# Altium PCB clock_pcb.PcbDoc (part 2 of 2)
Units mm, origin at the board's own origin, x right, y up, seen from the top; angles counter-clockwise.
Board outline 163.83 x 193.04 mm, 2 copper layers (Top Layer, Bottom Layer); 227 components, 201 nets, 760 pads, 289 vias.
Unrouted connection lines stored in the file: 74.
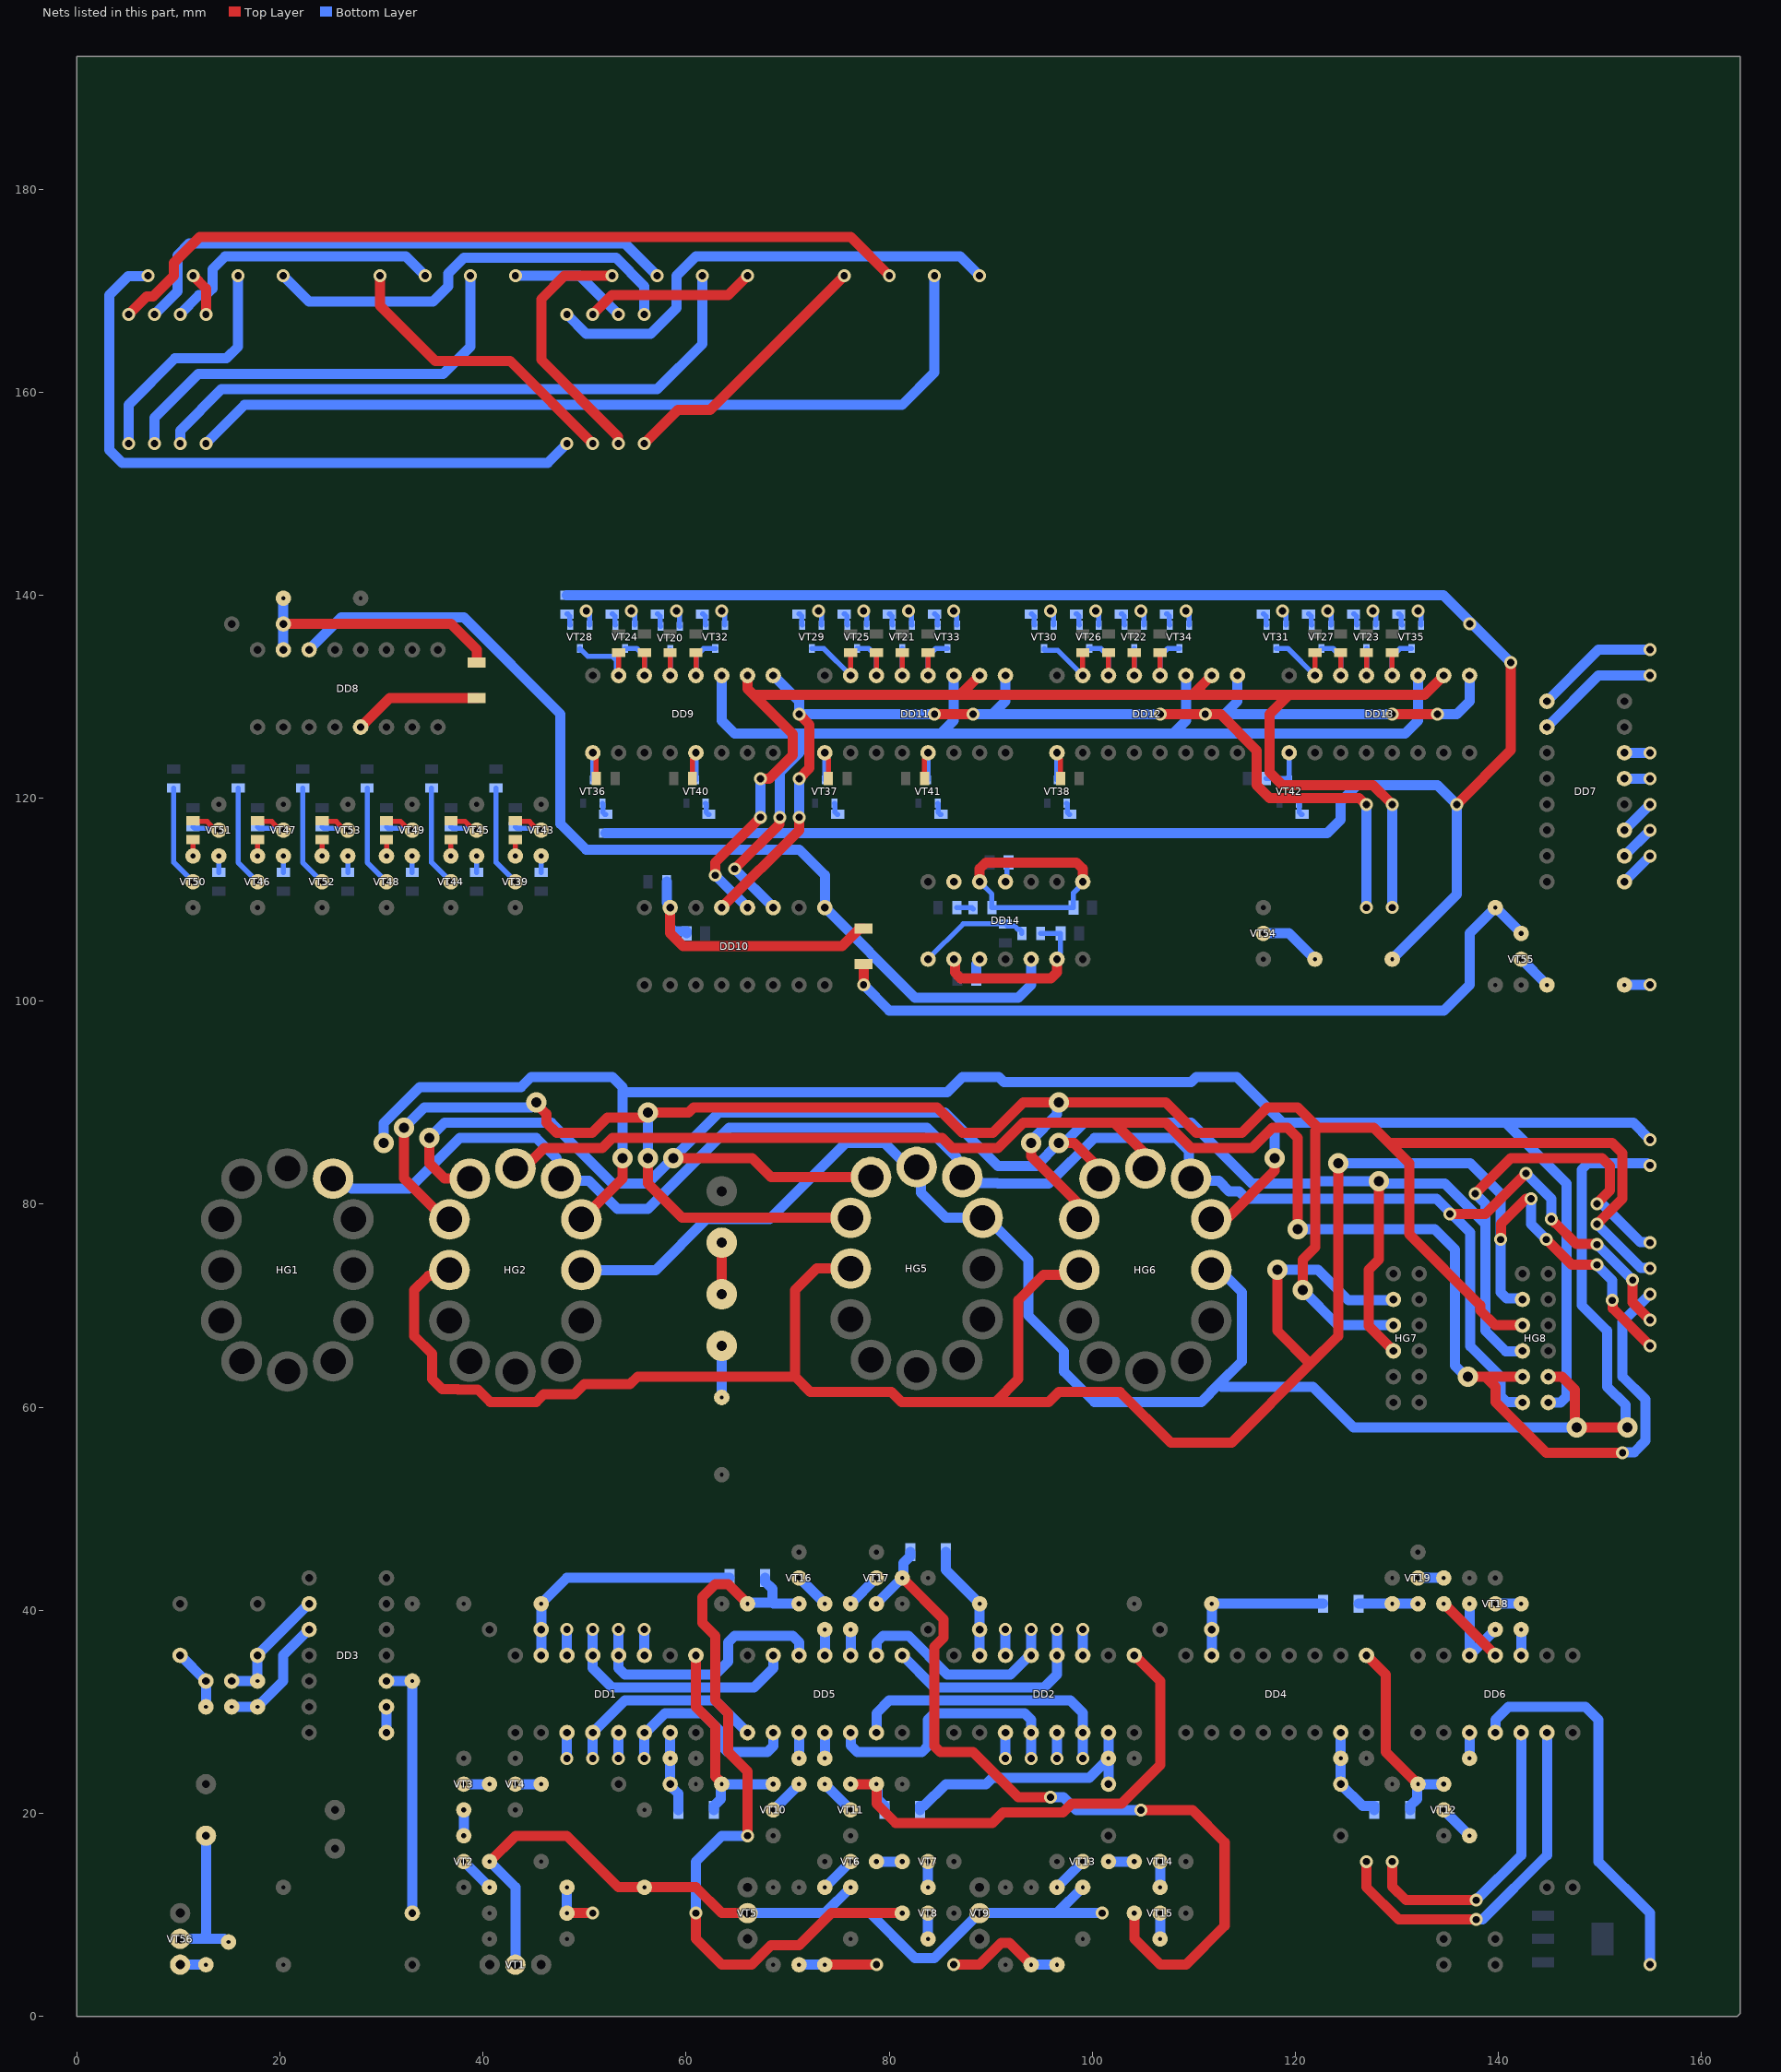
[diagram p2: the nets of this part, all layers, seen from the top]

## Via types
v1: diameter 1.27, hole 0.711, Top Layer to Bottom Layer, 220 vias
v2: diameter 2, hole 1, Top Layer to Bottom Layer, 49 vias
v3: diameter 3, hole 2, Top Layer to Bottom Layer, 16 vias
v4: diameter 2, hole 0.7, Top Layer to Bottom Layer, 2 vias
v5: diameter 2, hole 0.711, Top Layer to Bottom Layer, 2 vias

## Nets (pads, with @x,y where several pads share a name; then routed paths per layer and width w, separated by ;. In a path a pad name is that pad's centre, name@x,y a point inside that pad or via, vN(x,y) a via of type N, cw(c..) or ccw(c..) an arc to the next point about the centre after c; other vN are vias at no path point) (continued)
K3: DD7.9 HG2.9 HG5.9 HG6.9 HG7.5 HG8.5 | length 245.2
  Top Layer w1: HG2.9@36.68,73.5 36.106,72.926 34.626,72.926 33.22,71.52 33.22,67.02 34.97,65.27 34.97,62.77 35.97,61.77 37.515,61.77 37.539,61.746 39.494,61.746 40.72,60.52 45.22,60.52 45.97,61.27 48.97,61.27 49.97,62.27 54.47,62.27 55.22,63.02 70.72,63.02 ; HG5.9@76.2,73.66 72.86,73.66 70.72,71.52 70.72,63.02 ; HG6.9@98.72,73.52 98.22,73.02 95.22,73.02 92.72,70.52 92.72,62.77 90.47,60.52 ; v2@118.345,73.395 v2(118.22,73.52) 118.22,67.52 121.47,64.27 ; v2(124.22,84.02) 124.22,67.02 121.47,64.27 ; v1(140.22,76.52) 140.272,76.572 140.272,78.072 v1@142.72,80.52 ; v1(144.72,76.52) 147.22,74.02 v1(149.72,74.02) ; v1(151.22,70.52) 151.272,70.468 151.272,69.708 v1(154.94,66.04) ; 70.72,63.02 72.22,61.52 80.22,61.52 81.22,60.52 90.47,60.52 ; 90.47,60.52 95.72,60.52 96.72,61.52 102.72,61.52 107.72,56.52 113.72,56.52 121.47,64.27
  Bottom Layer w1: v2(118.22,73.52) 122.22,73.52 125.22,70.52 129.56,70.52 HG7.5@129.66,70.62 ; v2(124.22,84.02) 124.227,84.012 127.477,84.012 127.493,84.028 137.212,84.028 140.22,81.02 v1(140.22,76.52) 140.22,71.306 140.806,70.72 142.26,70.72 HG8.5@142.36,70.62 ; v1(143.22,80.52) 143.22,78.02 v1(144.72,76.52) ; v1(149.72,74.02) 149.72,74.001 151.22,72.501 v1(151.22,70.52) ; DD7.9@152.4,111.76 v1(154.94,114.3)
K4: DD7.13 HG2.8 HG5.8 HG6.8 HG7.6 HG8.6 | length 254.9
  Top Layer w1: v2@32.029,87.711 v2(32.22,87.52) 32.22,82.52 36.24,78.5 HG2.8@36.68,78.5 ; v2(45.22,90.02) 45.22,89.885 46.22,88.885 46.22,88.02 47.22,87.02 50.72,87.02 52.22,88.52 55.72,88.52 v2(56.22,89.02) 60.22,89.02 60.72,89.52 84.72,89.52 87.22,87.02 90.22,87.02 93.22,90.02 v2(96.72,90.02) 107.22,90.02 110.22,87.02 114.72,87.02 117.22,89.52 120.22,89.52 122.22,87.52 ; v2(56.22,84.52) 56.22,82.02 59.58,78.66 HG5.8@76.2,78.66 ; v2(93.97,86.02) 93.97,84.71 HG6.8@100.18,78.5 ; v2(120.72,71.52) 120.72,74.52 121.974,75.774 121.974,87.274 122.22,87.52 ; HG8.6@142.36,68.08 139.66,68.08 138.22,69.52 138.22,70.02 131.22,77.02 131.22,84.02 129.22,86.02 ; v1(149.718,78.022) 149.722,78.022 152.22,80.52 152.22,85.02 151.22,86.02 129.22,86.02 ; 122.22,87.52 127.72,87.52 129.22,86.02
  Bottom Layer w1: v2(32.22,87.52) 34.22,89.52 44.72,89.52 v2(45.22,90.02) ; v2(56.22,84.52) v2(56.22,89.02) ; v2(93.97,86.02) 93.97,86.27 96.529,88.829 96.529,89.829 v2(96.72,90.02) ; v2(120.72,71.52) 124.16,68.08 HG7.6@129.66,68.08 ; v1(149.718,78.022) 154.028,73.712 154.888,73.712 v1(154.94,73.66) ; DD7.13@152.4,121.92 v1(154.94,121.92)
K5: DD7.14 HG2.7 HG5.7 HG6.7 HG7.7 HG8.7 | length 216.8
  Top Layer w1: v2(34.72,86.52) 34.72,84.02 36.22,82.52 38.66,82.52 HG2.7@38.68,82.5 ; v2(58.72,84.52) 66.509,84.52 68.369,82.66 HG5.7@78.2,82.66 ; v2(96.72,86.02) 98.22,86.02 101.74,82.5 HG6.7@102.18,82.5 ; v2(128.22,82.274) 128.22,74.52 127.22,73.52 127.22,67.98 HG7.7@129.66,65.54 ; v1(137.72,81.02) 141.22,84.52 150.201,84.52 150.966,83.755 150.966,81.339 149.72,80.093 v1(149.72,80.02) ; HG8.7@142.34,65.52 HG8.7@142.36,65.54
  Bottom Layer w1: v2(34.72,86.52) 36.22,88.02 46.72,88.02 52.72,82.02 56.201,82.02 58.701,84.52 v2(58.72,84.52) 63.22,89.02 85.47,89.02 90.72,83.77 94.47,83.77 v2(96.72,86.02) ; v2@97.431,86.231 99.22,88.02 109.72,88.02 115.72,82.02 121.708,82.02 121.953,82.266 128.212,82.266 v2(128.22,82.274) ; v2@128.22,82.02 134.72,82.02 138.72,78.02 ; v1(137.72,81.02) 138.72,80.02 138.72,78.02 ; HG8.7@142.36,65.54 142.34,65.52 140.72,65.52 138.72,67.52 138.72,78.02 ; v1(149.72,80.02) 150.22,80.02 153.988,76.252 154.888,76.252 v1(154.94,76.2) ; DD7.14@152.4,124.46 v1(154.94,124.46)
K6: DD7.11 HG2.6 HG6.6 HG8.8 | length 172.6
  Top Layer w1: HG2.6@43.18,83.5 43.992,83.5 46.012,85.52 51.72,85.52 52.72,86.52 85.22,86.52 86.22,85.52 90.72,85.52 93.22,88.02 102.16,88.02 ; HG6.6@106.68,83.5 102.16,88.02 ; v2(120.22,77.52) 120.224,77.524 120.224,86.516 119.22,87.52 117.72,87.52 115.72,85.52 109.72,85.52 107.22,88.02 102.16,88.02 ; v2(137.011,63) 138.72,63 ; HG8.8@142.36,63 138.72,63 ; v1(152.22,55.52) 144.72,55.52 139.72,60.52 139.72,62 138.72,63
  Bottom Layer w1: v2(120.22,77.52) 133.72,77.52 135.72,75.52 135.72,64.086 136.806,63 v2(137.011,63) ; v1(152.22,55.52) 152.272,55.572 153.374,55.572 154.474,56.671 154.474,60.766 152.22,63.02 152.22,68.4 v1(154.94,71.12) ; DD7.11@152.4,116.84 v1(154.94,119.38)
K7: DD7.10 HG1.5 HG2.5 HG5.5 HG6.5 HG8.9 | length 185.4
  Top Layer w1: v1(135.22,79.02) 138.72,79.02 v1(142.72,83.02) ; v1@145.595,78.145 147.668,76.072 149.668,76.072 v1(149.72,76.02) ; v1(153.22,72.52) 153.22,70.3 v1(154.94,68.58)
  Bottom Layer w1: HG1.5@24.274,82.086 26.466,82.086 27.032,81.52 32.72,81.52 37.72,86.52 45.22,86.52 47.22,84.52 47.22,82.96 HG2.5@47.68,82.5 47.875,82.305 50.435,82.305 53.22,79.52 56.22,79.52 64.22,87.52 83.72,87.52 86.626,84.614 86.626,83.234 HG5.5@87.2,82.66 87.774,82.086 90.62,82.086 90.686,82.02 95.72,82.02 100.22,86.52 108.22,86.52 109.495,85.245 109.495,82.745 HG6.5@109.72,82.52 109.945,82.295 112.445,82.295 113.466,81.274 114.466,81.274 115.22,80.52 133.908,80.52 135.085,79.343 135.085,79.228 135.205,79.108 v1@135.308,79.108 ; v1@135.314,79.114 137.22,77.208 137.22,66.02 140.22,63.02 140.22,61.106 140.806,60.52 142.3,60.52 HG8.9@142.36,60.46 ; v1(142.72,83.02) 145.22,80.52 v1(145.22,78.52) ; v1(149.72,76.02) v1(153.22,72.52) ; DD7.10@152.4,114.3 v1(154.94,116.84)
K8: DD7.1 HG2.4 HG6.4 HG8.10 | length 202.9
  Top Layer w1: HG2.4@49.68,78.5 53.72,82.54 v2(53.72,84.52) ; HG6.4@113.18,78.5 117.97,83.29 v2(117.97,84.52)
  Bottom Layer w1: v2(30.22,86.02) 30.22,88.001 33.739,91.52 43.72,91.52 44.72,92.52 52.72,92.52 53.72,91.52 53.72,91.02 ; v2(53.72,84.52) 53.72,91.02 ; v2(117.97,84.52) 117.97,87.27 118.72,88.02 ; DD7.1@144.78,129.54 149.86,134.62 v1(154.94,134.62) ; HG8.10@144.9,60.46 146.134,60.46 146.72,61.046 146.72,82.02 140.72,88.02 ; v1(154.94,86.36) 153.28,88.02 140.72,88.02 ; 53.72,91.02 85.72,91.02 87.22,92.52 90.806,92.52 91.306,92.02 109.72,92.02 110.22,92.52 114.22,92.52 118.72,88.02 ; 118.72,88.02 140.72,88.02
K9: DD7.2 HG2.3 HG5.4 HG5.6 HG6.3 HG8.11 | length 193.5
  Top Layer w1: HG8.11@144.9,63 146.24,63 147.529,61.711 147.529,58.211 v2(147.72,58.02) v2@152.22,58.02
  Bottom Layer w1: HG2.3@49.68,73.5 56.99,73.5 62.01,78.52 68.22,78.52 75.72,86.02 79.528,86.02 81.888,83.66 HG5.6@82.7,83.66 83.115,83.245 83.115,81.125 85.58,78.66 89.58,78.66 93.72,74.52 93.72,69.02 97.22,65.52 97.22,63.52 100.22,60.52 110.72,60.52 112.47,62.27 114.72,64.52 114.72,71.332 112.532,73.52 HG6.3@111.72,73.52 ; 112.72,62.02 121.72,62.02 125.72,58.02 v2(147.72,58.02) ; DD7.2@144.78,127 149.86,132.08 v1(154.94,132.08) ; v2(152.72,58.02) 152.529,58.211 152.529,60.211 150.72,62.02 150.72,67.52 148.188,70.052 148.188,83.383 148.816,84.01 154.677,84.01 154.867,83.82 v1(154.94,83.82)
M1_Q1: DD2.3 VT28.2 | length 70.3
  Bottom Layer w0.5: v1(50.165,138.43) 50.48,138.115 VT28.2@50.48,137.04
  Bottom Layer w1: v1(6.985,171.45) 6.933,171.398 5.028,171.398 3.175,169.545 3.175,154.305 4.445,153.035 46.355,153.035 v1(48.26,154.94) ; v1(91.44,25.4) DD2.3@91.44,27.94
M1_Q2: DD2.4 DD5.5 VT29.2 | length 57.5
  Top Layer w1: v1(29.845,171.45) 29.845,168.529 35.306,163.068 42.672,163.068 v1(50.8,154.94)
  Bottom Layer w0.5: v1(73.025,138.43) 73.34,138.115 VT29.2@73.34,137.04
  Bottom Layer w1: DD5.5@76.2,27.94 76.2,26.67 76.835,26.035 83.234,26.035 83.82,26.621 83.82,29.21 84.455,29.845 93.345,29.845 93.98,29.21 DD2.4@93.98,27.94 v1(93.98,25.4)
M1_Q3: DD2.5 VT30.2 | length 29.4
  Top Layer w1: v1(52.705,171.45) 48.006,171.45 45.72,169.164 45.72,163.195 53.288,155.627 53.288,154.992 v1(53.34,154.94)
  Bottom Layer w0.5: v1(95.885,138.43) 96.2,138.115 VT30.2@96.2,137.04
  Bottom Layer w1: v1(96.52,25.4) DD2.5@96.52,27.94
M1_Q4: DD2.6 DD5.6 VT31.2 | length 55.8
  Top Layer w1: v1(55.88,154.94) 59.182,158.242 62.357,158.242 v1(75.565,171.45)
  Bottom Layer w0.5: v1(118.745,138.43) 119.06,138.115 VT31.2@119.06,137.04
  Bottom Layer w1: DD5.6@78.74,27.94 78.74,29.845 79.994,31.099 97.855,31.099 99.06,29.894 DD2.6@99.06,27.94 v1(99.06,25.4)
M10_Q1: DD2.11 VT32.2 | length 47.2
  Bottom Layer w0.5: v1(63.5,138.43) 63.815,138.115 VT32.2@63.815,137.04
  Bottom Layer w1: v1(20.32,171.45) 22.86,168.91 35.052,168.91 36.576,170.434 36.576,171.704 38.1,173.228 53.086,173.228 55.88,170.434 v1(55.88,167.64) ; DD2.11@99.06,35.56 v1(99.06,38.1)
M10_Q2: DD2.12 DD5.8 VT33.2 | length 34.8
  Bottom Layer w0.5: v1(86.36,138.43) 86.36,138.222 86.625,137.957 86.625,137.09 VT33.2@86.675,137.04
  Bottom Layer w1: v1(43.18,171.45) 49.53,171.45 v1(53.34,167.64) ; DD5.8@81.28,35.56 84.455,32.385 95.25,32.385 96.52,33.655 DD2.12@96.52,35.56 v1(96.52,38.1)
M10_Q3: DD2.13 DD5.9 VT34.2 | length 40
  Top Layer w1: v1(50.8,167.64) 52.705,169.545 64.135,169.545 v1(66.04,171.45)
  Bottom Layer w0.5: v1(109.22,138.43) 109.535,138.115 VT34.2@109.535,137.04
  Bottom Layer w1: DD5.9@78.74,35.56 78.74,36.83 79.375,37.465 81.915,37.465 85.725,33.655 91.933,33.655 93.838,35.56 DD2.13@93.98,35.56 v1(93.98,38.1)
M10_Q4: DD2.14 VT35.2 | length 51.3
  Bottom Layer w0.5: v1(132.08,138.43) 132.395,138.115 VT35.2@132.395,137.04
  Bottom Layer w1: v1(48.26,167.64) 50.165,165.735 56.515,165.735 59.055,168.275 59.055,171.45 60.96,173.355 86.995,173.355 v1(88.9,171.45) ; DD2.14@91.44,35.56 v1(91.44,38.1)
MUX1_D1: DD9.13 R44.2 VT20.3 | length 4.8
  Top Layer w0.5: DD9.13@58.42,132.08 R44.2@58.42,134.33
  Bottom Layer w0.5: DD9.13@58.42,132.08 VT20.3@58.42,134.62
MUX1_D2: DD9.14 R52.2 VT24.3 | length 6.4
  Top Layer w0.5: DD9.14@55.88,132.08 R52.2@55.88,134.33
  Bottom Layer w0.5: VT24.3@53.975,134.74 55.125,134.74 55.88,133.985 DD9.14@55.88,132.08
MUX1_D3: DD9.15 R60.2 VT28.3 | length 8
  Top Layer w0.5: DD9.15@53.34,132.08 R60.2@53.34,134.33
  Bottom Layer w0.5: VT28.3@49.53,134.74 49.53,134.59 49.58,134.54 49.73,134.54 50.285,133.985 52.705,133.985 53.144,133.546 53.144,132.276 DD9.15@53.34,132.08
MUX1_D4: DD9.12 R68.2 VT32.3 | length 6.4
  Top Layer w0.5: DD9.12@60.96,132.08 R68.2@60.96,134.33
  Bottom Layer w0.5: DD9.12@60.96,132.08 60.96,133.985 61.715,134.74 VT32.3@62.865,134.74
MUX1_D5: DD9.1 R75.2 VT36.3 | length 5.3
  Top Layer w0.5: DD9.1@50.8,124.46 50.8,124.183 51.145,123.838 R75.2@51.145,121.92
  Bottom Layer w0.5: VT36.3@50.8,121.8 DD9.1@50.8,124.46
MUX1_D6: DD9.5 R84.2 VT40.3 | length 5.3
  Top Layer w0.5: R84.2@60.615,121.92 60.615,123.838 60.96,124.183 DD9.5@60.96,124.46
  Bottom Layer w0.5: VT40.3@60.96,121.8 DD9.5@60.96,124.46
MUX2_D1: DD11.13 R45.2 VT21.3 | length 4.9
  Top Layer w0.5: DD11.13@81.28,132.08 R45.2@81.28,134.33
  Bottom Layer w0.5: DD11.13@81.28,132.08 VT21.3@81.28,134.74
MUX2_D2: DD11.14 R53.2 VT25.3 | length 6.4
  Top Layer w0.5: DD11.14@78.74,132.08 R53.2@78.74,134.33
  Bottom Layer w0.5: VT25.3@76.835,134.74 77.985,134.74 78.74,133.985 DD11.14@78.74,132.08
MUX2_D3: DD11.15 R61.2 VT29.3 | length 7.2
  Top Layer w0.5: DD11.15@76.2,132.08 R61.2@76.2,134.33
  Bottom Layer w0.5: VT29.3@72.39,134.74 73.54,134.74 DD11.15@76.2,132.08
MUX2_D4: DD11.12 R69.2 VT33.3 | length 6.4
  Top Layer w0.5: DD11.12@83.82,132.08 R69.2@83.82,134.33
  Bottom Layer w0.5: DD11.12@83.82,132.08 83.82,133.985 84.575,134.74 VT33.3@85.725,134.74
MUX2_D5: DD11.1 R76.2 VT37.3 | length 5.3
  Top Layer w0.5: DD11.1@73.66,124.46 73.66,124.183 74.005,123.838 R76.2@74.005,121.92
  Bottom Layer w0.5: VT37.3@73.66,121.8 DD11.1@73.66,124.46
MUX2_D6: DD11.5 R85.2 VT41.3 | length 5.3
  Top Layer w0.5: R85.2@83.475,121.92 83.475,123.838 83.82,124.183 DD11.5@83.82,124.46
  Bottom Layer w0.5: VT41.3@83.82,121.8 DD11.5@83.82,124.46
MUX3_D1: DD12.13 R46.2 VT22.3 | length 4.9
  Top Layer w0.5: DD12.13@104.14,132.08 R46.2@104.14,134.33
  Bottom Layer w0.5: DD12.13@104.14,132.08 VT22.3@104.14,134.74
MUX3_D2: DD12.14 R54.2 VT26.3 | length 6.4
  Top Layer w0.5: DD12.14@101.6,132.08 R54.2@101.6,134.33
  Bottom Layer w0.5: VT26.3@99.695,134.74 100.845,134.74 101.6,133.985 DD12.14@101.6,132.08
MUX3_D3: DD12.15 R62.2 VT30.3 | length 7.2
  Top Layer w0.5: DD12.15@99.06,132.08 R62.2@99.06,134.33
  Bottom Layer w0.5: VT30.3@95.25,134.74 95.25,134.613 95.3,134.563 96.577,134.563 DD12.15@99.06,132.08
MUX3_D4: DD12.12 R70.2 VT34.3 | length 6.4
  Top Layer w0.5: DD12.12@106.68,132.08 R70.2@106.68,134.33
  Bottom Layer w0.5: DD12.12@106.68,132.08 106.68,133.985 107.435,134.74 VT34.3@108.585,134.74
MUX3_D5: DD12.1 R77.2 VT38.3 | length 5.3
  Top Layer w0.5: DD12.1@96.52,124.46 96.52,124.183 96.865,123.838 R77.2@96.865,121.92
  Bottom Layer w0.5: VT38.3@96.52,121.8 DD12.1@96.52,124.46
MUX4_D1: DD13.13 R47.2 VT23.3 | length 4.9
  Top Layer w0.5: DD13.13@127,132.08 R47.2@127,134.33
  Bottom Layer w0.5: DD13.13@127,132.08 VT23.3@127,134.74
MUX4_D2: DD13.14 R55.2 VT27.3 | length 6.4
  Top Layer w0.5: DD13.14@124.46,132.08 R55.2@124.46,134.33
  Bottom Layer w0.5: VT27.3@122.555,134.74 123.705,134.74 124.46,133.985 DD13.14@124.46,132.08
MUX4_D3: DD13.15 R63.2 VT31.3 | length 7.2
  Top Layer w0.5: DD13.15@121.92,132.08 R63.2@121.92,134.33
  Bottom Layer w0.5: VT31.3@118.11,134.74 119.26,134.74 DD13.15@121.92,132.08
MUX4_D4: DD13.12 R71.2 VT35.3 | length 6.4
  Top Layer w0.5: DD13.12@129.54,132.08 R71.2@129.54,134.33
  Bottom Layer w0.5: DD13.12@129.54,132.08 129.54,133.985 130.295,134.74 VT35.3@131.445,134.74
MUX4_D5: DD13.1 R86.2 VT42.3 | length 5
  Bottom Layer w0.5: R86.2@117.13,121.92 119.26,121.92 VT42.3@119.38,121.8 DD13.1@119.38,124.46
MUX_CLK: DD8.14 DD10.1 DD14.5 | length 99.2
  Bottom Layer w1: DD8.14@22.86,134.62 26.035,137.795 38.1,137.795 47.625,128.27 47.625,117.475 50.165,114.935 71.12,114.935 73.66,112.395 DD10.1@73.66,109.22 82.55,100.33 92.71,100.33 93.98,101.6 DD14.5@93.98,104.14
MUX_IN_EN: R40.1 R41.1 R42.1 R43.1 R48.1 R49.1 R50.1 R51.1 R56.1 R57.1 R58.1 R59.1 R64.1 R65.1 R66.1 R67.1 R72.1 R73.1 R74.1 R79.1 R80.1 R81.1 R109.1 | length 217.4
  Top Layer w1: v1(135.89,119.38) 141.224,124.714 v1(141.224,133.35)
  Bottom Layer w1: R56.1@48.26,139.99 R48.1@52.705,139.99 R40.1@57.15,139.99 R64.1@61.595,139.99 R57.1@71.12,139.99 R49.1@75.565,139.99 R41.1@80.01,139.99 R65.1@84.455,139.99 R58.1@93.98,139.99 R50.1@98.425,139.99 R42.1@102.87,139.99 R66.1@107.315,139.99 R59.1@116.84,139.99 R51.1@121.285,139.99 R43.1@125.73,139.99 R67.1@130.175,139.99 134.584,139.99 v1(141.224,133.35) ; R72.1@52.07,116.55 R79.1@62.23,116.55 R73.1@74.93,116.55 R80.1@85.09,116.55 R74.1@97.79,116.55 107.95,116.55 R81.1@120.65,116.55 123.154,116.55 124.46,117.856 124.46,119.634 126.111,121.285 133.985,121.285 v1(135.89,119.38) 135.89,110.49 R109.1@129.54,104.14
  other v1: 137.16,137.16
NetC2_1: C2.1 DD3.9 R4.2 ZQ1.2 | length 12.3
  Bottom Layer w1: ZQ1.2@15.24,33.02 R4.2@17.78,33.02 C2.1@17.78,35.56 DD3.9@22.86,40.64
NetC3_2: C3.2 R1.1 ZQ1.1 | length 6.1
  Bottom Layer w1: C3.2@10.16,35.56 ZQ1.1@12.7,33.02 R1.1@12.7,30.48
NetC4_1: C4.1 DD3.3 R3.2 | length 25.4
  Bottom Layer w1: DD3.3@30.48,33.02 R3.2@33.02,33.02 C4.1@33.02,10.16
NetC15_1: C15.1 DD14.2 DD14.6 R114.1 | length 17.9
  Top Layer w1: DD14.2@86.36,104.14 86.46,104.04 86.46,102.821 87.046,102.235 95.934,102.235 96.52,102.821 DD14.6@96.52,104.14
  Bottom Layer w0.5: R114.1@94.905,106.68 C15.1@96.865,106.68 96.865,104.762 96.52,104.417 DD14.6@96.52,104.14
NetC16_2: C16.2 DD14.3 | length 2.2
  Bottom Layer w1: C16.2@88.555,102.235 88.555,103.653 88.9,103.998 DD14.3@88.9,104.14 DD14.3@88.9,104.282
NetC17_1: C17.1 DD14.8 DD14.12 R116.1 | length 27.2
  Top Layer w1: DD14.12@88.9,111.76 88.9,113.03 89.535,113.665 98.425,113.665 99.06,113.03 DD14.8@99.06,111.76
  Bottom Layer w0.5: DD14.12@88.9,111.76 90.115,110.545 R116.1@90.115,109.22 C17.1@98.135,109.22 98.135,110.67 99.06,111.595 DD14.8@99.06,111.76
NetC18_2: C18.2 DD14.11 | length 2
  Bottom Layer w0.5: DD14.11@91.44,111.76 91.585,111.905 91.585,113.52 C18.2@91.73,113.665
NetDD3_1: DD3.1 DD3.2 | length 2.5
  Bottom Layer w1: DD3.1@30.48,27.94 DD3.2@30.48,30.48
NetDD3_10: DD3.10 R1.2 R4.1 | length 12.3
  Bottom Layer w1: R1.2@15.24,30.48 R4.1@17.78,30.48 20.32,33.02 20.32,35.56 DD3.10@22.86,38.1
NetDD5_3: DD5.3 R20.1 | length 2.5
  Bottom Layer w1: R20.1@71.12,25.4 DD5.3@71.12,27.94
NetDD5_4: DD5.4 R21.1 | length 2.5
  Bottom Layer w1: R21.1@73.66,25.4 DD5.4@73.66,27.94
NetDD5_10: DD5.10 R33.1 | length 2.5
  Bottom Layer w1: DD5.10@76.2,35.56 R33.1@76.2,38.1
NetDD5_11: DD5.11 R32.1 | length 2.5
  Bottom Layer w1: DD5.11@73.66,35.56 R32.1@73.66,38.1
NetDD6_3: DD6.3 R22.1 | length 2.5
  Bottom Layer w1: R22.1@137.16,25.4 DD6.3@137.16,27.94
NetDD6_4: DD6.4 R111.1 | length 41.3
  Bottom Layer w1: DD6.4@139.7,27.94 139.7,29.21 140.97,30.48 148.59,30.48 149.86,29.21 149.86,15.24 154.94,10.16 v1(154.94,5.08) ; R111.1@152.4,101.6 v1(154.94,101.6)
NetDD6_10: DD6.10 R34.1 | length 2.5
  Bottom Layer w1: DD6.10@142.24,35.56 R34.1@142.24,38.1
NetDD6_11: DD6.11 R35.1 | length 7.2
  Top Layer w1: R35.1@134.62,40.64 DD6.11@139.7,35.56
NetDD8_5: DD8.5 VD7.2 | length 12.6
  Top Layer w1: DD8.5@27.94,127 30.79,129.85 VD7.2@39.37,129.85
NetDD14_1: DD14.1 R113.1 R114.2 | length 11.2
  Bottom Layer w0.5: DD14.1@83.82,104.14 87.285,107.605 87.92,107.605 R113.1@91.44,107.605 91.64,107.405 92.33,107.405 92.655,107.08 92.855,107.08 93.055,106.88 R114.2@93.055,106.68
NetDD14_13: DD14.13 R115.1 R116.2 | length 1.7
  Bottom Layer w0.5: R115.1@86.65,109.22 88.12,109.22 R116.2@88.265,109.075
NetHG3_1: HG3.1 R117.2 | length 5.1
  Bottom Layer w1: R117.2@63.5,60.96 HG3.1@63.5,66.04
NetHG3_2: HG3.2 HG4.1 | length 5.1
  Top Layer w1: HG3.2@63.5,71.12 HG4.1@63.5,76.2
NetL1_2: L1.2 VD9.2 VT56.2 | length 15.2
  Bottom Layer w1: VT56.2@10.16,7.62 12.321,7.62 ; L1.2@12.7,17.78 12.7,7.999 12.321,7.62 ; VD9.2@14.932,7.312 14.79,7.312 14.482,7.62 12.321,7.62
NetR6_2: R6.2 VT2.2 | length 3.6
  Bottom Layer w1: VT2.2@38.1,15.24 R6.2@40.64,12.7
NetR7_2: R7.2 VT3.2 | length 2.5
  Bottom Layer w1: VT3.2@38.1,22.86 R7.2@40.64,22.86
NetR8_1: R8.1 VT4.2 | length 2.5
  Bottom Layer w1: VT4.2@43.18,22.86 R8.1@45.72,22.86
NetR14_2: R14.2 VT6.2 | length 3.6
  Bottom Layer w1: R14.2@73.66,12.7 VT6.2@76.2,15.24
NetR15_2: R15.2 VT7.2 | length 2.5
  Bottom Layer w1: R15.2@83.82,12.7 VT7.2@83.82,15.24
NetR18_1: R18.1 VT8.2 | length 2.5
  Bottom Layer w1: R18.1@83.82,7.62 VT8.2@83.82,10.16
NetR20_2: R20.2 VT10.2 | length 3.6
  Bottom Layer w1: VT10.2@68.58,20.32 R20.2@71.12,22.86
NetR21_2: R21.2 VT11.2 | length 3.6
  Bottom Layer w1: R21.2@73.66,22.86 VT11.2@76.2,20.32
NetR22_2: R22.2 VT12.2 | length 3.6
  Bottom Layer w1: VT12.2@134.62,20.32 R22.2@137.16,17.78
NetR28_2: R28.2 VT13.2 | length 3.6
  Bottom Layer w1: R28.2@96.52,12.7 VT13.2@99.06,15.24
NetR29_2: R29.2 VT14.2 | length 2.5
  Bottom Layer w1: R29.2@106.68,12.7 VT14.2@106.68,15.24
NetR30_1: R30.1 VT15.2 | length 2.5
  Bottom Layer w1: R30.1@106.68,7.62 VT15.2@106.68,10.16
NetR32_2: R32.2 VT16.2 | length 3.6
  Bottom Layer w1: VT16.2@71.12,43.18 R32.2@73.66,40.64
NetR33_2: R33.2 VT17.2 | length 3.6
  Bottom Layer w1: R33.2@76.2,40.64 VT17.2@78.74,43.18
NetR34_2: R34.2 VT18.2 | length 2.5
  Bottom Layer w1: VT18.2@139.7,40.64 R34.2@142.24,40.64
NetR35_2: R35.2 VT19.2 | length 2.5
  Bottom Layer w1: VT19.2@132.08,43.18 R35.2@134.62,43.18
NetR40_2: R40.2 VT20.1 | length 1.4
  Bottom Layer w0.5: R40.2@57.15,138.14 57.22,138.14 57.42,137.94 57.42,136.97 VT20.1@57.47,136.92
NetR41_2: R41.2 VT21.1 | length 1.3
  Bottom Layer w0.5: R41.2@80.01,138.14 80.08,138.14 80.28,137.94 80.28,137.09 VT21.1@80.33,137.04
NetR42_2: R42.2 VT22.1 | length 1.3
  Bottom Layer w0.5: R42.2@102.87,138.14 102.94,138.14 103.14,137.94 103.14,137.09 VT22.1@103.19,137.04
NetR43_2: R43.2 VT23.1 | length 1.3
  Bottom Layer w0.5: R43.2@125.73,138.14 125.8,138.14 126,137.94 126,137.09 VT23.1@126.05,137.04
NetR48_2: R48.2 VT24.1 | length 1.3
  Bottom Layer w0.5: R48.2@52.705,138.14 52.775,138.14 52.975,137.94 52.975,137.09 VT24.1@53.025,137.04
NetR49_2: R49.2 VT25.1 | length 1.3
  Bottom Layer w0.5: R49.2@75.565,138.14 75.635,138.14 75.835,137.94 75.835,137.09 VT25.1@75.885,137.04
NetR50_2: R50.2 VT26.1 | length 1.3
  Bottom Layer w0.5: R50.2@98.425,138.14 98.495,138.14 98.695,137.94 98.695,137.09 VT26.1@98.745,137.04
NetR51_2: R51.2 VT27.1 | length 1.3
  Bottom Layer w0.5: R51.2@121.285,138.14 121.355,138.14 121.555,137.94 121.555,137.09 VT27.1@121.605,137.04
NetR56_2: R56.2 VT28.1 | length 1.3
  Bottom Layer w0.5: R56.2@48.26,138.14 48.33,138.14 48.53,137.94 48.53,137.09 VT28.1@48.58,137.04
NetR57_2: R57.2 VT29.1 | length 1.3
  Bottom Layer w0.5: R57.2@71.12,138.14 71.19,138.14 71.39,137.94 71.39,137.09 VT29.1@71.44,137.04
NetR58_2: R58.2 VT30.1 | length 1.3
  Bottom Layer w0.5: R58.2@93.98,138.14 94.05,138.14 94.25,137.94 94.25,137.09 VT30.1@94.3,137.04
NetR59_2: R59.2 VT31.1 | length 1.3
  Bottom Layer w0.5: R59.2@116.84,138.14 116.91,138.14 117.11,137.94 117.11,137.09 VT31.1@117.16,137.04
NetR64_2: R64.2 VT32.1 | length 1.3
  Bottom Layer w0.5: R64.2@61.595,138.14 61.665,138.14 61.865,137.94 61.865,137.09 VT32.1@61.915,137.04
NetR65_2: R65.2 VT33.1 | length 1.3
  Bottom Layer w0.5: R65.2@84.455,138.14 84.525,138.14 84.725,137.94 84.725,137.09 VT33.1@84.775,137.04
NetR66_2: R66.2 VT34.1 | length 1.3
  Bottom Layer w0.5: R66.2@107.315,138.14 107.385,138.14 107.585,137.94 107.585,137.09 VT34.1@107.635,137.04
NetR67_2: R67.2 VT35.1 | length 1.3
  Bottom Layer w0.5: R67.2@130.175,138.14 130.245,138.14 130.445,137.94 130.445,137.09 VT35.1@130.495,137.04
NetR72_2: R72.2 VT36.1 | length 1.3
  Bottom Layer w0.5: VT36.1@51.75,119.5 51.8,119.45 51.8,118.6 52,118.4 R72.2@52.07,118.4
NetR73_2: R73.2 VT37.1 | length 1.3
  Bottom Layer w0.5: VT37.1@74.61,119.5 74.66,119.45 74.66,118.6 74.86,118.4 R73.2@74.93,118.4
NetR74_2: R74.2 VT38.1 | length 1.3
  Bottom Layer w0.5: VT38.1@97.47,119.5 97.52,119.45 97.52,118.6 97.72,118.4 R74.2@97.79,118.4
NetR78_2: R78.2 VT39.2 | length 10
  Bottom Layer w0.5: R78.2@41.275,120.995 41.275,113.665 VT39.2@43.18,111.76
NetR79_2: R79.2 VT40.1 | length 1.3
  Bottom Layer w0.5: VT40.1@61.91,119.5 61.96,119.45 61.96,118.6 62.16,118.4 R79.2@62.23,118.4
NetR80_2: R80.2 VT41.1 | length 1.3
  Bottom Layer w0.5: VT41.1@84.77,119.5 84.82,119.45 84.82,118.6 85.02,118.4 R80.2@85.09,118.4
NetR81_2: R81.2 VT42.1 | length 1.3
  Bottom Layer w0.5: VT42.1@120.33,119.5 120.38,119.45 120.38,118.6 120.58,118.4 R81.2@120.65,118.4
NetR82_1: R82.1 R83.2 VT43.2 | length 5.6
  Top Layer w0.5: R83.2@43.18,117.765 43.242,117.703 44.58,117.703 45.443,116.84 VT43.2@45.72,116.84
  Bottom Layer w0.5: R82.1@43.18,117.185 43.353,117.012 45.548,117.012 VT43.2@45.72,116.84
NetR83_1: R83.1 VT39.3 | length 1.6
  Top Layer w0.5: VT39.3@43.18,114.3 R83.1@43.18,115.915
NetR87_2: R87.2 VT43.3 | length 1.6
  Bottom Layer w0.5: R87.2@45.72,112.685 VT43.3@45.72,114.3
NetR88_2: R88.2 VT44.2 | length 10
  Bottom Layer w0.5: R88.2@34.925,120.995 34.925,113.665 VT44.2@36.83,111.76
NetR90_1: R90.1 R91.2 VT45.2 | length 5.6
  Top Layer w0.5: R91.2@36.83,117.765 36.892,117.703 38.23,117.703 39.093,116.84 VT45.2@39.37,116.84
  Bottom Layer w0.5: R90.1@36.83,117.185 37.003,117.012 39.198,117.012 VT45.2@39.37,116.84
NetR91_1: R91.1 VT44.3 | length 1.6
  Top Layer w0.5: VT44.3@36.83,114.3 R91.1@36.83,115.915
NetR92_2: R92.2 VT46.2 | length 10
  Bottom Layer w0.5: R92.2@15.875,120.995 15.875,113.665 VT46.2@17.78,111.76
NetR93_2: R93.2 VT45.3 | length 1.6
  Bottom Layer w0.5: R93.2@39.37,112.685 VT45.3@39.37,114.3
NetR94_1: R94.1 R95.2 VT47.2 | length 5.6
  Top Layer w0.5: R95.2@17.78,117.765 17.842,117.703 19.18,117.703 20.043,116.84 VT47.2@20.32,116.84
  Bottom Layer w0.5: R94.1@17.78,117.185 17.953,117.012 20.148,117.012 VT47.2@20.32,116.84
NetR95_1: R95.1 VT46.3 | length 1.6
  Top Layer w0.5: VT46.3@17.78,114.3 R95.1@17.78,115.915
NetR96_2: R96.2 VT48.2 | length 10
  Bottom Layer w0.5: R96.2@28.575,120.995 28.575,113.665 VT48.2@30.48,111.76
NetR97_2: R97.2 VT47.3 | length 1.6
  Bottom Layer w0.5: R97.2@20.32,112.685 VT47.3@20.32,114.3
NetR98_1: R98.1 R99.2 VT49.2 | length 5.6
  Top Layer w0.5: R99.2@30.48,117.765 30.542,117.703 31.88,117.703 32.743,116.84 VT49.2@33.02,116.84
  Bottom Layer w0.5: R98.1@30.48,117.185 30.653,117.012 32.848,117.012 VT49.2@33.02,116.84
NetR99_1: R99.1 VT48.3 | length 1.6
  Top Layer w0.5: VT48.3@30.48,114.3 R99.1@30.48,115.915
NetR100_2: R100.2 VT50.2 | length 10
  Bottom Layer w0.5: R100.2@9.525,120.995 9.525,113.665 VT50.2@11.43,111.76
NetR101_2: R101.2 VT49.3 | length 1.6
  Bottom Layer w0.5: R101.2@33.02,112.685 VT49.3@33.02,114.3
NetR102_1: R102.1 R103.2 VT51.2 | length 5.6
  Top Layer w0.5: R103.2@11.43,117.765 11.492,117.703 12.83,117.703 13.693,116.84 VT51.2@13.97,116.84
  Bottom Layer w0.5: R102.1@11.43,117.185 11.603,117.012 13.798,117.012 VT51.2@13.97,116.84
NetR103_1: R103.1 VT50.3 | length 1.6
  Top Layer w0.5: VT50.3@11.43,114.3 R103.1@11.43,115.915
NetR104_2: R104.2 VT52.2 | length 10.7
  Bottom Layer w0.5: 22.225,114.3 22.225,113.665 ; R104.2@22.225,120.995 22.225,113.665 ; VT52.2@24.13,111.76 22.225,113.665
NetR105_2: R105.2 VT51.3 | length 1.6
  Bottom Layer w0.5: R105.2@13.97,112.685 VT51.3@13.97,114.3
NetR106_1: R106.1 R107.2 VT53.2 | length 5.6
  Top Layer w0.5: R107.2@24.13,117.765 24.192,117.703 25.53,117.703 26.393,116.84 VT53.2@26.67,116.84
  Bottom Layer w0.5: R106.1@24.13,117.185 24.303,117.012 26.498,117.012 VT53.2@26.67,116.84
NetR107_1: R107.1 VT52.3 | length 1.6
  Top Layer w0.5: VT52.3@24.13,114.3 R107.1@24.13,115.915
NetR108_2: R108.2 VT53.3 | length 1.6
  Bottom Layer w0.5: R108.2@26.67,112.685 VT53.3@26.67,114.3
NetR109_2: R109.2 VT54.2 | length 6.1
  Bottom Layer w1: VT54.2@116.84,106.68 119.38,106.68 R109.2@121.92,104.14
NetR111_2: R111.2 VT55.2 | length 3.6
  Bottom Layer w1: VT55.2@142.24,104.14 R111.2@144.78,101.6
NetR112_2: R112.2 VD8.2 VT55.1 | length 76.1
  Top Layer w1: v1(77.47,101.6) VD8.2@77.47,103.66
  Bottom Layer w1: v1(77.47,101.6) 80.01,99.06 134.62,99.06 137.16,101.6 137.16,106.68 R112.2@139.7,109.22 VT55.1@142.24,106.68
NetR118_2: R118.2 VT56.1 | length 2.5
  Bottom Layer w1: VT56.1@10.16,5.08 R118.2@12.7,5.08
NetVT2_1: VT2.1 VT3.3 | length 2.5
  Bottom Layer w1: VT2.1@38.1,17.78 VT3.3@38.1,20.32
NetVT6_1: VT6.1 VT7.3 | length 2.5
  Bottom Layer w1: VT6.1@78.74,15.24 VT7.3@81.28,15.24
NetVT13_1: VT13.1 VT14.3 | length 2.5
  Bottom Layer w1: VT13.1@101.6,15.24 VT14.3@104.14,15.24
RES: C13.1 DD8.15 R89.2 VD7.1 | length 26.5
  Top Layer w1: C13.1@20.32,137.16 36.83,137.16 39.37,134.62 VD7.1@39.37,133.35
  Bottom Layer w1: DD8.15@20.32,134.62 C13.1@20.32,137.16 R89.2@20.32,139.7
RES_COUNT: C14.1 DD10.7 R110.2 VD8.1 | length 29.5
  Top Layer w1: DD10.7@58.42,109.22 58.42,106.68 59.69,105.41 75.345,105.41 77.095,107.16 VD8.1@77.47,107.16
  Bottom Layer w1: R110.2@58.075,111.76 58.075,109.707 58.42,109.362 DD10.7@58.42,109.22 58.42,107.266 58.806,106.88 60.035,106.88 C14.1@60.035,106.68
Res_h1: C11.1 DD4.7 R17.2 VD3.1 | length 9.7
  Bottom Layer w1: DD4.7@124.46,27.94 R17.2@124.46,25.4 C11.1@124.46,22.86 126.625,20.695 127.79,20.695 VD3.1@127.79,20.32
Res_h1_t: DD4.9 R26.2 VD3.2 VT12.1 | length 20.2
  Top Layer w1: DD4.9@127,35.56 128.905,33.655 128.905,26.035 R26.2@132.08,22.86
  Bottom Layer w1: VD3.2@131.29,20.32 131.29,20.695 131.98,21.385 131.98,22.76 R26.2@132.08,22.86 VT12.1@134.62,22.86
Res_h10: C12.1 DD4.15 R19.2 VD6.1 | length 16
  Bottom Layer w1: DD4.15@111.76,35.56 C12.1@111.76,38.1 R19.2@111.76,40.64 VD6.1@122.71,40.64
Res_h10_t: R39.2 VD6.2 VT19.1 | length 5.9
  Bottom Layer w1: VD6.2@126.21,40.64 R39.2@129.54,40.64 VT19.1@132.08,40.64
Res_m1: C9.1 DD2.7 R12.2 VD2.1 | length 26
  Bottom Layer w1: VD2.1@83.03,20.32 83.03,20.695 83.405,20.695 85.57,22.86 89.535,22.86 90.17,23.495 99.695,23.495 R12.2@101.6,25.4 ; C9.1@101.6,22.86 R12.2@101.6,25.4 ; DD2.7@101.6,27.94 R12.2@101.6,25.4
Res_m1_t: DD2.9 R25.2 VD2.2 VT11.1 | length 50.3
  Top Layer w1: VT11.1@76.2,22.86 R25.2@78.74,22.86 78.74,20.955 80.645,19.05 90.17,19.05 91.202,20.082 97.095,20.082 97.968,20.955 102.87,20.955 106.68,24.765 106.68,33.02 DD2.9@104.14,35.56
  Bottom Layer w1: R25.2@78.74,22.86 78.84,22.76 78.84,21.385 79.53,20.695 VD2.2@79.53,20.32
Res_m10: C10.1 DD2.15 R16.2 VD5.1 | length 11.5
  Bottom Layer w1: VD5.1@85.57,45.72 85.57,43.97 R16.2@88.9,40.64 C10.1@88.9,38.1 DD2.15@88.9,35.56
Res_m10_t: R37.2 VD5.2 VT15.3 VT17.1 | length 79.9
  Top Layer w1: R37.2@81.28,43.18 85.336,39.124 85.336,37.274 84.455,36.393 84.455,26.621 85.041,26.035 88.265,26.035 92.71,21.59 v1(95.885,21.59) ; VT15.3@104.14,10.16 104.14,7.62 106.68,5.08 109.22,5.08 113.03,8.89 113.03,17.145 109.855,20.32 v1(104.775,20.32)
  Bottom Layer w1: VT17.1@78.74,40.64 R37.2@81.28,43.18 81.38,43.28 81.38,44.655 82.07,45.345 VD5.2@82.07,45.72 ; v1(95.885,21.59) 97.155,21.59 98.425,20.32 v1(104.775,20.32)
Res_s1: C7.1 DD1.7 R9.2 VD1.1 | length 7.9
  Bottom Layer w1: DD1.7@58.42,27.94 R9.2@58.42,25.4 C7.1@58.42,22.86 58.42,22.718 59.21,21.928 VD1.1@59.21,20.32
Res_s1_t: DD1.9 R24.2 VD1.2 VT10.1 | length 21.7
  Top Layer w1: DD1.9@60.96,35.56 60.96,30.48 62.865,28.575 62.865,23.637 63.5,23.002 R24.2@63.5,22.86
  Bottom Layer w1: VD1.2@62.71,20.32 62.71,20.695 63.4,21.385 63.4,22.76 R24.2@63.5,22.86 VT10.1@68.58,22.86
Res_s10: C8.1 DD1.15 R10.2 VD4.1 | length 24.7
  Bottom Layer w1: DD1.15@45.72,35.56 C8.1@45.72,38.1 R10.2@45.72,40.64 48.26,43.18 VD4.1@64.29,43.18
Res_s10_t: R36.2 VD4.2 VT8.3 VT16.1 | length 76.2
  Top Layer w1: v1(60.96,10.16) 60.96,7.62 63.5,5.08 66.436,5.08 68.341,6.985 71.12,6.985 74.295,10.16 VT8.3@81.28,10.16 ; v1(66.04,17.78) 66.04,24.13 64.135,26.035 64.135,29.845 62.865,31.115 62.865,37.465 61.595,38.735 61.595,41.275 62.865,42.545 64.135,42.545 R36.2@66.04,40.64
  Bottom Layer w1: v1(60.96,10.16) 60.96,15.24 63.5,17.78 v1(66.04,17.78) ; R36.2@66.04,40.64 66.14,40.74 68.48,40.74 ; VD4.2@67.79,43.18 67.79,42.805 68.48,42.115 68.48,40.74 ; VT16.1@71.12,40.64 68.58,40.64 68.48,40.74
Res_t: DD6.12 R38.2 VT18.1 | length 8.7
  Bottom Layer w1: R38.2@137.16,40.64 DD6.12@137.16,35.56 VT18.1@139.7,38.1
S1_Q1: DD1.3 VT20.2 | length 28.1
  Bottom Layer w0.5: v1(59.055,138.43) 59.365,138.12 59.365,136.925 VT20.2@59.37,136.92
  Bottom Layer w1: v1(5.08,154.94) 5.08,158.75 9.652,163.322 14.732,163.322 15.875,164.465 v1(15.875,171.45) ; v1(48.26,25.4) DD1.3@48.26,27.94
S1_Q2: DD1.4 DD5.1 VT21.2 | length 65.5
  Bottom Layer w0.5: v1(81.915,138.43) 82.18,138.165 82.18,137.09 VT21.2@82.23,137.04
  Bottom Layer w1: v1(7.62,154.94) 7.62,157.48 11.938,161.798 36.068,161.798 38.735,164.465 v1(38.735,171.45) ; v1(50.8,25.4) DD1.4@50.8,27.94 53.975,31.115 62.865,31.115 DD5.1@66.04,27.94
S1_Q3: DD1.5 VT22.2 | length 67
  Bottom Layer w0.5: v1(104.775,138.43) 105.09,138.115 VT22.2@105.09,137.04
  Bottom Layer w1: v1(10.16,154.94) 10.16,156.21 14.224,160.274 57.15,160.274 61.595,164.719 v1(61.595,171.45) ; v1(53.34,25.4) DD1.5@53.34,27.94
S1_Q4: DD1.6 DD5.2 VT23.2 | length 105.6
  Bottom Layer w0.5: v1(127.635,138.43) 127.95,138.115 VT23.2@127.95,137.04
  Bottom Layer w1: v1(12.7,154.94) 16.51,158.75 81.28,158.75 84.455,161.925 v1(84.455,171.45) ; v1(55.88,25.4) DD1.6@55.88,27.94 56.022,27.94 57.927,29.845 61.595,29.845 63.5,27.94 63.5,26.621 64.086,26.035 67.994,26.035 68.58,26.621 DD5.2@68.58,27.94
S10_Q1: DD1.11 VT24.2 | length 8.4
  Top Layer w1: v1(11.43,171.45) 12.7,170.18 v1(12.7,167.64)
  Bottom Layer w0.5: v1(54.61,138.43) 54.925,138.115 VT24.2@54.925,137.04
  Bottom Layer w1: DD1.11@55.88,35.56 v1(55.88,38.1)
S10_Q2: DD1.12 DD5.12 VT25.2 | length 56
  Bottom Layer w0.5: v1(77.47,138.43) 77.785,138.115 VT25.2@77.785,137.04
  Bottom Layer w1: v1(10.16,167.64) 10.16,167.689 12.016,169.545 12.7,169.545 13.335,170.18 13.335,172.085 14.605,173.355 32.385,173.355 v1(34.29,171.45) ; v1(53.34,38.1) DD1.12@53.34,35.56 53.34,34.29 53.975,33.655 62.865,33.655 64.135,34.925 64.135,36.83 64.77,37.465 70.485,37.465 71.12,36.83 DD5.12@71.12,35.56
S10_Q3: DD1.13 DD5.13 VT26.2 | length 81.8
  Bottom Layer w0.5: v1(100.33,138.43) 100.645,138.115 VT26.2@100.645,137.04
  Bottom Layer w1: v1(7.62,167.64) 9.906,169.926 9.906,173.482 11.049,174.625 53.975,174.625 v1(57.15,171.45) ; v1(50.8,38.1) DD1.13@50.8,35.56 50.8,34.29 52.705,32.385 66.675,32.385 68.58,34.29 DD5.13@68.58,35.56
S10_Q4: DD1.14 VT27.2 | length 84.5
  Top Layer w1: v1(5.08,167.64) 6.858,169.418 7.493,169.418 9.525,171.45 9.525,172.72 12.065,175.26 76.2,175.26 v1(80.01,171.45)
  Bottom Layer w0.5: v1(123.19,138.43) 123.505,138.115 VT27.2@123.505,137.04
  Bottom Layer w1: DD1.14@48.26,35.56 v1(48.26,38.1)
Set_hor: R27.1 R28.1 | length 11.9
  Top Layer w1: v1(86.36,5.08) 88.9,5.08 91.026,7.206 91.854,7.206 R27.1@93.98,5.08
  Bottom Layer w1: R27.1@93.98,5.08 R28.1@96.52,5.08
Set_min: R13.1 R14.1 | length 7.6
  Top Layer w1: R14.1@73.66,5.08 v1(78.74,5.08)
  Bottom Layer w1: R13.1@71.12,5.08 R14.1@73.66,5.08
Set_sec: R5.1 R6.1 | length 5.1
  Top Layer w1: R5.1@48.26,10.16 v1(50.8,10.16)
  Bottom Layer w1: R5.1@48.26,10.16 R6.1@48.26,12.7
Set_time: R7.1 R15.1 R29.1 R31.2 VT1.2 VT5.2 VT9.2 | length 86.6
  Top Layer w1: R7.1@40.64,15.24 43.18,17.78 48.26,17.78 53.34,12.7 60.96,12.7 63.5,10.16 VT5.2@66.04,10.16
  Bottom Layer w1: R7.1@40.64,15.24 43.18,12.7 VT1.2@43.18,5.08 ; VT5.2@66.04,10.16 73.66,10.16 ; R15.1@76.2,12.7 73.66,10.16 ; R29.1@99.06,12.7 96.52,10.16 ; v1(100.965,10.16) 96.52,10.16 ; 73.66,10.16 78.105,10.16 82.55,5.715 84.455,5.715 VT9.2@88.9,10.16 96.52,10.16
X1: DD9.11 DD10.3 DD11.11 DD12.11 DD13.11 | length 112.4
  Top Layer w1: v1(64.77,113.03) 69.163,117.423 69.163,118.058 v1(69.215,118.11)
  Bottom Layer w1: DD9.11@63.5,132.08 63.5,127.635 64.77,126.365 71.12,126.365 ; v1(64.77,113.03) DD10.3@68.58,109.22 ; v1(69.215,118.11) 69.215,122.555 71.12,124.46 71.12,126.365 ; DD11.11@86.36,132.08 86.36,127.635 85.09,126.365 ; DD12.11@109.22,132.08 109.22,127.635 107.95,126.365 ; DD13.11@132.08,132.08 132.08,127.635 130.81,126.365 107.95,126.365 ; 71.12,126.365 85.09,126.365 ; 85.09,126.365 107.95,126.365
X2: DD6.5 DD9.10 DD10.4 DD11.10 DD12.10 DD13.10 | length 165.3
  Top Layer w1: v1(62.865,112.395) 62.865,113.665 v1(67.31,118.11) ; DD9.10@66.04,132.08 66.04,130.761 66.626,130.175 ; v1(67.31,121.92) 68.184,121.92 70.485,124.221 70.485,126.316 66.626,130.175 ; DD11.10@88.9,132.08 86.995,130.175 ; DD12.10@111.76,132.08 109.855,130.175 ; v1@129.44,119.48 127.635,121.285 118.745,121.285 117.475,122.555 117.475,128.27 119.38,130.175 ; v1(129.54,15.24) 129.54,12.773 130.883,11.43 v1(137.795,11.43) ; DD13.10@134.62,132.08 132.715,130.175 119.38,130.175 ; 66.626,130.175 86.995,130.175 ; 86.995,130.175 109.855,130.175 ; 109.855,130.175 119.38,130.175
  Bottom Layer w1: v1(62.865,112.395) DD10.4@66.04,109.22 ; v1(67.31,118.11) v1(67.31,121.92) ; v1(129.54,109.22) v1(129.54,119.38) ; v1(137.795,11.43) 142.24,15.875 DD6.5@142.24,27.94
X3: DD6.6 DD9.9 DD10.5 DD11.9 DD12.9 DD13.9 | length 173.7
  Top Layer w1: DD10.5@63.5,109.22 71.12,116.84 v1(71.12,118.11) ; v1(71.12,121.92) 72.144,122.944 72.144,127.246 v1(71.12,128.27) ; v1(84.455,128.27) v1(88.265,128.27) ; v1(106.68,128.27) v1(111.125,128.27) 112.634,128.27 116.205,124.699 116.205,121.285 117.475,120.015 126.292,120.015 126.927,119.38 v1(127,119.38) ; v1(127,15.24) 127,12.7 130.175,9.525 v1(137.795,9.525) ; v1(129.54,128.27) v1(133.985,128.27)
  Bottom Layer w1: DD9.9@68.58,132.08 71.12,129.54 v1(71.12,128.27) v1(84.455,128.27) ; v1(71.12,118.11) v1(71.12,121.92) ; v1(88.265,128.27) 90.17,128.27 ; DD11.9@91.44,132.08 91.44,129.54 90.17,128.27 ; v1(106.68,128.27) 90.17,128.27 ; v1(111.125,128.27) 113.03,128.27 ; DD12.9@114.3,132.08 114.3,129.54 113.03,128.27 ; v1(127,109.22) v1(127,119.38) ; v1(129.54,128.27) 113.03,128.27 ; v1(133.985,128.27) 135.89,128.27 137.16,129.54 DD13.9@137.16,132.08 ; v1(137.795,9.525) 138.43,9.525 144.78,15.875 DD6.6@144.78,27.94
pads on no net: DA1.4 DD3.4 DD3.8 DD3.11 DD3.12 DD3.13 DD8.6 DD8.9 DD8.11 DD8.12 DD10.6 DD10.11 DD10.12 DD10.13 DD10.14 HG1.3 HG1.4 HG1.6 HG1.7 HG1.8 HG1.9 HG1.12 HG2.12 HG5.3 HG5.12 HG6.12 HG7.8 HG7.9 HG7.10 HG7.11 HG7.12 HG8.12
copper on no net: | length 3040.6
  Top Layer w0.2: 7.125,130.81 0,130.81 ; 7.225,82.55 0,82.55 ; 7.62,82.55 7.62,62.347 7.503,62.23 0,62.23 ; 7.62,130.81 7.62,110.607 7.503,110.49 0,110.49 ; 43.18,193.04 0,193.04 0,144.78 ; 134.62,193.04 163.83,193.04 163.83,144.487 ; 156.21,62.23 156.21,82.433 156.327,82.55 163.83,82.55 ; 156.597,62.23 163.83,62.23 ; 0,7.62 0,13.97 ; 0,7.62 0,0 7.62,0 ; 0,7.62 7.62,0 ; 0,13.97 7.503,13.97 7.62,14.087 7.62,34.173 7.503,34.29 0,34.29 ; 0,13.97 0,34.29 ; 0,34.29 0,40.64 ; 0,40.64 0,48.26 ; 0,40.64 7.62,48.26 ; 0,48.26 0,55.88 ; 0,48.26 7.62,48.26 ; 0,55.88 0,62.23 ; 0,55.88 7.62,48.26 ; 0,62.23 0,82.55 ; 0,82.55 0,88.9 ; 0,88.9 0,96.52 ; 0,88.9 7.62,96.52 ; 0,96.52 0,104.14 ; 0,96.52 7.62,96.52 ; 0,104.14 0,110.49 ; 0,104.14 7.62,96.52 ; 0,110.49 0,130.81 ; 0,130.81 0,137.16 ; 0,137.16 0,144.78 ; 0,137.16 7.62,144.78 ; 0,144.78 91.44,144.78 91.44,177.8 0,177.8 0,144.78 ; 0,144.78 7.62,144.78 ; 7.62,0 156.21,0 ; 7.62,48.26 156.21,48.26 ; 7.62,96.52 156.21,96.52 ; 7.62,144.78 156.21,144.78 ; 156.21,0 163.537,0 163.83,0.293 163.83,7.62 ; 156.21,0 163.83,7.62 ; 156.21,48.26 163.83,48.26 ; 156.21,48.26 163.83,40.64 ; 156.21,48.26 163.83,55.88 ; 156.21,96.52 163.83,96.52 ; 156.21,96.52 163.83,88.9 ; 156.21,96.52 163.83,104.14 ; 156.21,144.78 163.537,144.78 163.83,144.487 ; 156.21,144.78 163.83,137.16 ; 163.83,7.62 163.83,13.97 ; 163.83,13.97 163.83,34.29 ; 163.83,13.97 156.327,13.97 156.21,14.087 156.21,34.173 156.327,34.29 163.83,34.29 ; 163.83,34.29 163.83,40.64 ; 163.83,40.64 163.83,48.26 ; 163.83,48.26 163.83,55.88 ; 163.83,55.88 163.83,62.23 ; 163.83,62.23 163.83,82.55 ; 163.83,82.55 163.83,88.9 ; 163.83,88.9 163.83,96.52 ; 163.83,96.52 163.83,104.14 ; 163.83,104.14 163.83,110.49 ; 163.83,110.49 156.21,110.49 156.21,130.693 156.327,130.81 163.83,130.81 ; 163.83,110.49 163.83,130.81 ; 163.83,130.81 163.83,137.16 ; 163.83,137.16 163.83,144.487
  Top Layer w0.254: 0,7.62 ccw(c7.62,7.62) 7.62,0 ; 0,40.64 cw(c7.62,40.64) 7.62,48.26 cw(c7.62,55.88) 0,55.88 ; 0,88.9 cw(c7.62,88.9) 7.62,96.52 cw(c7.62,104.14) 0,104.14 ; 0,137.16 cw(c7.62,137.16) 7.62,144.78 ; 156.21,0 ccw(c156.21,7.62) 163.83,7.62 ; 156.21,144.78 cw(c156.21,137.16) 163.83,137.16 ; 163.83,40.64 ccw(c156.21,40.64) 156.21,48.26 ccw(c156.21,55.88) 163.83,55.88 ; 163.83,88.9 ccw(c156.21,88.9) 156.21,96.52 ccw(c156.21,104.14) 163.83,104.14
  Bottom Layer w0.2: 0,48.26 0,40.64 0,34.29 0,13.97 0,7.62 0,0 7.62,0 156.21,0 163.537,0 163.83,0.293 163.83,7.62 163.83,13.97 163.83,34.29 163.83,40.64 163.83,48.26 ; 0,48.26 0,55.88 0,62.23 0,82.55 0,88.9 0,96.52 ; 0,48.26 7.62,48.26 156.21,48.26 163.83,48.26 ; 0,96.52 0,104.14 0,110.49 0,130.81 0,137.16 0,144.78 ; 0,96.52 7.62,96.52 156.21,96.52 163.83,96.52 ; 0,144.78 7.62,144.78 156.21,144.78 163.537,144.78 163.83,144.487 163.83,137.16 163.83,130.81 163.83,110.49 163.83,104.14 163.83,96.52 ; 0,144.78 0,177.8 91.44,177.8 91.44,144.78 0,144.78 ; 163.83,48.26 163.83,55.88 163.83,62.23 163.83,82.55 163.83,88.9 163.83,96.52
  other v3: 3.81,7.62 160.02,7.62 3.81,17.78 160.02,17.78 3.81,30.48 160.02,30.48 3.81,40.64 160.02,40.64 3.81,55.88 160.02,55.88 3.81,88.9 160.02,88.9 3.81,104.14 160.02,104.14 3.81,137.16 160.02,137.16

## Polygon pours and split planes (outlines as drawn)
GND on Top Layer "GND_L01_P000" (solid, pour order 0): 15.875,35.56 12.065,35.56 12.065,45.72 15.875,45.72

## Silkscreen, mask and mechanical layers (free items; w line width, h text height)
Top Overlay:
  circle w0.254: c100.72,57.52 r1.5
  circle w0.254: c76.72,57.52 r1.5
  circle w0.254: c37.22,57.52 r1.5
  circle w0.254: c13.22,57.52 r1.5
  circle w0.254: c112.72,89.52 r1.5
  circle w0.254: c88.72,89.52 r1.5
  circle w0.254: c49.22,89.52 r1.5
  circle w0.254: c25.22,89.52 r1.5
  lines w0.2: 156.21,80.01 156.21,88.9 ; 49.53,8.89 49.53,11.43 52.07,11.43 52.07,8.89 49.53,8.89 ; 77.47,3.81 77.47,6.35 80.01,6.35 80.01,3.81 77.47,3.81 ; 85.09,3.81 85.09,6.35 87.63,6.35 87.63,3.81 85.09,3.81 ; 99.695,8.89 99.695,11.43 102.235,11.43 102.235,8.89 99.695,8.89 ; 116.84,12.7 121.92,12.7 121.92,17.78 116.84,17.78 116.84,12.7 ; 135.89,135.89 135.89,138.43 138.43,138.43 138.43,135.89 135.89,135.89

## Text inside footprints (layer, text, board x,y; h text height)
DA1: Bottom Overlay "GND" at 142.42,4.02 h0.4 r180; Bottom Overlay "OUT" at 142.42,6.52 h0.4 r180; Bottom Overlay "IN" at 142.42,9.02 h0.4 r180
VD1: Bottom Overlay "K" at 58.56,18.72 h0.4 r180; Bottom Overlay "A" at 62.56,18.72 h0.4 r180
VD2: Bottom Overlay "K" at 83.68,21.92 h0.4; Bottom Overlay "A" at 79.68,21.92 h0.4
VD3: Bottom Overlay "K" at 127.14,18.72 h0.4 r180; Bottom Overlay "A" at 131.14,18.72 h0.4 r180
VD4: Bottom Overlay "K" at 63.64,41.58 h0.4 r180; Bottom Overlay "A" at 67.64,41.58 h0.4 r180
VD5: Bottom Overlay "K" at 86.22,47.32 h0.4; Bottom Overlay "A" at 82.22,47.32 h0.4
VD6: Bottom Overlay "K" at 122.06,39.04 h0.4 r180; Bottom Overlay "A" at 126.06,39.04 h0.4 r180
VD7: Top Overlay "K" at 40.97,134 h0.4 r270; Top Overlay "A" at 40.97,130 h0.4 r270
VD8: Top Overlay "A" at 79.07,103.81 h0.4 r270; Top Overlay "K" at 79.07,107.81 h0.4 r270
VT1: Top Overlay "D" at 45.24,3.18 h0.4; Top Overlay "G" at 42.74,3.18 h0.4; Top Overlay "S" at 40.24,3.18 h0.4
VT2: Top Overlay "C" at 36.2,18.18 h0.4 r270; Top Overlay "B" at 36.2,15.68 h0.4 r270; Top Overlay "E" at 36.2,13.18 h0.4 r270
VT3: Top Overlay "E" at 36.2,20.8 h0.4 r270; Top Overlay "C" at 36.2,25.8 h0.4 r270; Top Overlay "B" at 36.2,23.3 h0.4 r270
VT4: Top Overlay "E" at 41.28,20.8 h0.4 r270; Top Overlay "C" at 41.28,25.8 h0.4 r270; Top Overlay "B" at 41.28,23.3 h0.4 r270
VT5: Top Overlay "D" at 64.14,8.1 h0.4 r270; Top Overlay "G" at 64.14,10.6 h0.4 r270; Top Overlay "S" at 64.14,13.1 h0.4 r270
VT6: Top Overlay "E" at 74.14,17.14 h0.4 r180; Top Overlay "B" at 76.64,17.14 h0.4 r180; Top Overlay "C" at 79.14,17.14 h0.4 r180
VT7: Top Overlay "C" at 86.76,17.14 h0.4 r180; Top Overlay "B" at 84.26,17.14 h0.4 r180; Top Overlay "E" at 81.76,17.14 h0.4 r180
VT8: Top Overlay "E" at 81.76,12.06 h0.4 r180; Top Overlay "B" at 84.26,12.06 h0.4 r180; Top Overlay "C" at 86.76,12.06 h0.4 r180
VT9: Top Overlay "D" at 87,8.1 h0.4 r270; Top Overlay "G" at 87,10.6 h0.4 r270; Top Overlay "S" at 87,13.1 h0.4 r270
VT10: Top Overlay "C" at 66.68,23.26 h0.4 r270; Top Overlay "B" at 66.68,20.76 h0.4 r270; Top Overlay "E" at 66.68,18.26 h0.4 r270
VT11: Top Overlay "E" at 74.3,18.26 h0.4 r270; Top Overlay "B" at 74.3,20.76 h0.4 r270; Top Overlay "C" at 74.3,23.26 h0.4 r270
VT12: Top Overlay "E" at 132.72,18.26 h0.4 r270; Top Overlay "B" at 132.72,20.76 h0.4 r270; Top Overlay "C" at 132.72,23.26 h0.4 r270
VT13: Top Overlay "E" at 97,17.14 h0.4 r180; Top Overlay "B" at 99.5,17.14 h0.4 r180; Top Overlay "C" at 102,17.14 h0.4 r180
VT14: Top Overlay "E" at 104.62,17.14 h0.4 r180; Top Overlay "B" at 107.12,17.14 h0.4 r180; Top Overlay "C" at 109.62,17.14 h0.4 r180
VT15: Top Overlay "E" at 104.62,12.06 h0.4 r180; Top Overlay "B" at 107.12,12.06 h0.4 r180; Top Overlay "C" at 109.62,12.06 h0.4 r180
VT16: Top Overlay "E" at 73.02,45.24 h0.4 r90; Top Overlay "B" at 73.02,42.74 h0.4 r90; Top Overlay "C" at 73.02,40.24 h0.4 r90
VT17: Top Overlay "E" at 80.64,45.24 h0.4 r90; Top Overlay "B" at 80.64,42.74 h0.4 r90; Top Overlay "C" at 80.64,40.24 h0.4 r90
VT18: Top Overlay "E" at 141.6,42.7 h0.4 r90; Top Overlay "B" at 141.6,40.2 h0.4 r90; Top Overlay "C" at 141.6,37.7 h0.4 r90
VT19: Top Overlay "C" at 133.98,40.24 h0.4 r90; Top Overlay "B" at 133.98,42.74 h0.4 r90; Top Overlay "E" at 133.98,45.24 h0.4 r90
VT20: Bottom Overlay "B" at 56.37,137.72 h0.2 r90; Bottom Overlay "C" at 57.87,134.22 h0.2 r90; Bottom Overlay "E" at 60.37,137.72 h0.2 r90
VT21: Bottom Overlay "B" at 79.23,137.84 h0.2 r90; Bottom Overlay "C" at 80.73,134.34 h0.2 r90; Bottom Overlay "E" at 83.23,137.84 h0.2 r90
VT22: Bottom Overlay "B" at 102.09,137.84 h0.2 r90; Bottom Overlay "C" at 103.59,134.34 h0.2 r90; Bottom Overlay "E" at 106.09,137.84 h0.2 r90
VT23: Bottom Overlay "B" at 124.95,137.84 h0.2 r90; Bottom Overlay "C" at 126.45,134.34 h0.2 r90; Bottom Overlay "E" at 128.95,137.84 h0.2 r90
VT24: Bottom Overlay "B" at 51.925,137.84 h0.2 r90; Bottom Overlay "C" at 53.425,134.34 h0.2 r90; Bottom Overlay "E" at 55.925,137.84 h0.2 r90
VT25: Bottom Overlay "B" at 74.785,137.84 h0.2 r90; Bottom Overlay "C" at 76.285,134.34 h0.2 r90; Bottom Overlay "E" at 78.785,137.84 h0.2 r90
VT26: Bottom Overlay "B" at 97.645,137.84 h0.2 r90; Bottom Overlay "C" at 99.145,134.34 h0.2 r90; Bottom Overlay "E" at 101.645,137.84 h0.2 r90
VT27: Bottom Overlay "B" at 120.505,137.84 h0.2 r90; Bottom Overlay "C" at 122.005,134.34 h0.2 r90; Bottom Overlay "E" at 124.505,137.84 h0.2 r90
VT28: Bottom Overlay "B" at 47.48,137.84 h0.2 r90; Bottom Overlay "C" at 48.98,134.34 h0.2 r90; Bottom Overlay "E" at 51.48,137.84 h0.2 r90
VT29: Bottom Overlay "B" at 70.34,137.84 h0.2 r90; Bottom Overlay "C" at 71.84,134.34 h0.2 r90; Bottom Overlay "E" at 74.34,137.84 h0.2 r90
VT30: Bottom Overlay "B" at 93.2,137.84 h0.2 r90; Bottom Overlay "C" at 94.7,134.34 h0.2 r90; Bottom Overlay "E" at 97.2,137.84 h0.2 r90
VT31: Bottom Overlay "B" at 116.06,137.84 h0.2 r90; Bottom Overlay "C" at 117.56,134.34 h0.2 r90; Bottom Overlay "E" at 120.06,137.84 h0.2 r90
VT32: Bottom Overlay "B" at 60.815,137.84 h0.2 r90; Bottom Overlay "C" at 62.315,134.34 h0.2 r90; Bottom Overlay "E" at 64.815,137.84 h0.2 r90
VT33: Bottom Overlay "B" at 83.675,137.84 h0.2 r90; Bottom Overlay "C" at 85.175,134.34 h0.2 r90; Bottom Overlay "E" at 87.675,137.84 h0.2 r90
VT34: Bottom Overlay "B" at 106.535,137.84 h0.2 r90; Bottom Overlay "C" at 108.035,134.34 h0.2 r90; Bottom Overlay "E" at 110.535,137.84 h0.2 r90
VT35: Bottom Overlay "B" at 129.395,137.84 h0.2 r90; Bottom Overlay "C" at 130.895,134.34 h0.2 r90; Bottom Overlay "E" at 133.395,137.84 h0.2 r90
VT36: Bottom Overlay "E" at 48.85,118.7 h0.2 r270; Bottom Overlay "B" at 52.85,118.7 h0.2 r270; Bottom Overlay "C" at 51.35,122.2 h0.2 r270
VT37: Bottom Overlay "E" at 71.71,118.7 h0.2 r270; Bottom Overlay "B" at 75.71,118.7 h0.2 r270; Bottom Overlay "C" at 74.21,122.2 h0.2 r270
VT38: Bottom Overlay "E" at 94.57,118.7 h0.2 r270; Bottom Overlay "B" at 98.57,118.7 h0.2 r270; Bottom Overlay "C" at 97.07,122.2 h0.2 r270
VT39: Top Overlay "C" at 44.985,114.4 h0.4 r90; Top Overlay "B" at 44.985,111.86 h0.4 r90; Top Overlay "E" at 44.985,109.32 h0.4 r90
VT40: Bottom Overlay "E" at 59.01,118.7 h0.2 r270; Bottom Overlay "B" at 63.01,118.7 h0.2 r270; Bottom Overlay "C" at 61.51,122.2 h0.2 r270
VT41: Bottom Overlay "E" at 81.87,118.7 h0.2 r270; Bottom Overlay "B" at 85.87,118.7 h0.2 r270; Bottom Overlay "C" at 84.37,122.2 h0.2 r270
VT42: Bottom Overlay "E" at 117.43,118.7 h0.2 r270; Bottom Overlay "B" at 121.43,118.7 h0.2 r270; Bottom Overlay "C" at 119.93,122.2 h0.2 r270
VT43: Top Overlay "C" at 43.915,114.2 h0.4 r270; Top Overlay "E" at 43.915,119.28 h0.4 r270; Top Overlay "B" at 43.915,116.74 h0.4 r270
VT44: Top Overlay "E" at 38.635,109.32 h0.4 r90; Top Overlay "B" at 38.635,111.86 h0.4 r90; Top Overlay "C" at 38.635,114.4 h0.4 r90
VT45: Top Overlay "E" at 37.565,119.28 h0.4 r270; Top Overlay "B" at 37.565,116.74 h0.4 r270; Top Overlay "C" at 37.565,114.2 h0.4 r270
VT46: Top Overlay "E" at 19.585,109.32 h0.4 r90; Top Overlay "B" at 19.585,111.86 h0.4 r90; Top Overlay "C" at 19.585,114.4 h0.4 r90
VT47: Top Overlay "E" at 18.515,119.28 h0.4 r270; Top Overlay "B" at 18.515,116.74 h0.4 r270; Top Overlay "C" at 18.515,114.2 h0.4 r270
VT48: Top Overlay "E" at 32.285,109.32 h0.4 r90; Top Overlay "B" at 32.285,111.86 h0.4 r90; Top Overlay "C" at 32.285,114.4 h0.4 r90
VT49: Top Overlay "E" at 31.215,119.28 h0.4 r270; Top Overlay "B" at 31.215,116.74 h0.4 r270; Top Overlay "C" at 31.215,114.2 h0.4 r270
VT50: Top Overlay "E" at 13.235,109.32 h0.4 r90; Top Overlay "B" at 13.235,111.86 h0.4 r90; Top Overlay "C" at 13.235,114.4 h0.4 r90
VT51: Top Overlay "E" at 12.165,119.28 h0.4 r270; Top Overlay "B" at 12.165,116.74 h0.4 r270; Top Overlay "C" at 12.165,114.2 h0.4 r270
VT52: Top Overlay "E" at 25.935,109.32 h0.4 r90; Top Overlay "B" at 25.935,111.86 h0.4 r90; Top Overlay "C" at 25.935,114.4 h0.4 r90
VT53: Top Overlay "E" at 24.865,119.28 h0.4 r270; Top Overlay "B" at 24.865,116.74 h0.4 r270; Top Overlay "C" at 24.865,114.2 h0.4 r270
VT54: Top Overlay "E" at 114.94,104.62 h0.4 r270; Top Overlay "B" at 114.94,107.12 h0.4 r270; Top Overlay "C" at 114.94,109.62 h0.4 r270
VT55: Top Overlay "E" at 140.34,102.08 h0.4 r270; Top Overlay "B" at 140.34,104.58 h0.4 r270; Top Overlay "C" at 140.34,107.08 h0.4 r270
VT56: Top Overlay "S" at 12.092,10.006 h0.4 r90; Top Overlay "G" at 12.092,4.926 h0.4 r90; Top Overlay "D" at 12.092,7.466 h0.4 r90